# EAGLE board BMP384 Breakout-Panel (EAGLE 9.6.2), part 1 of 7
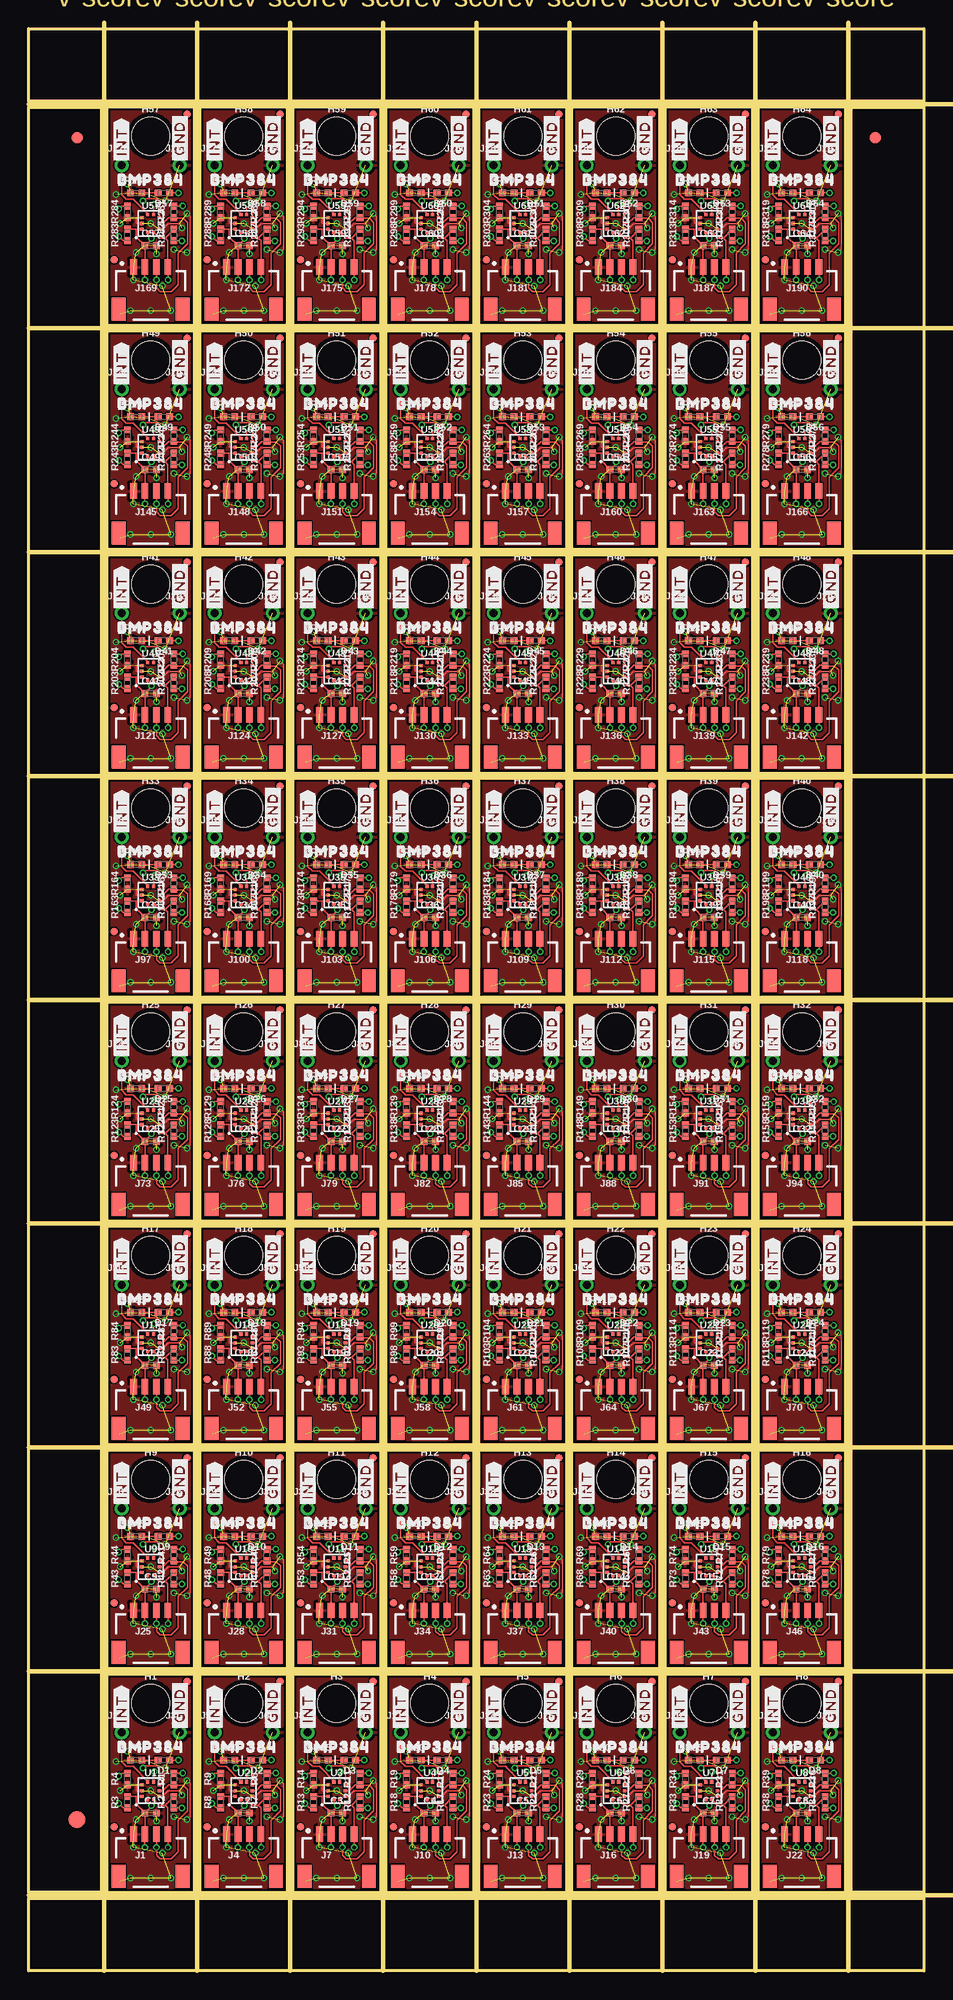
[diagram p0: board, top side]
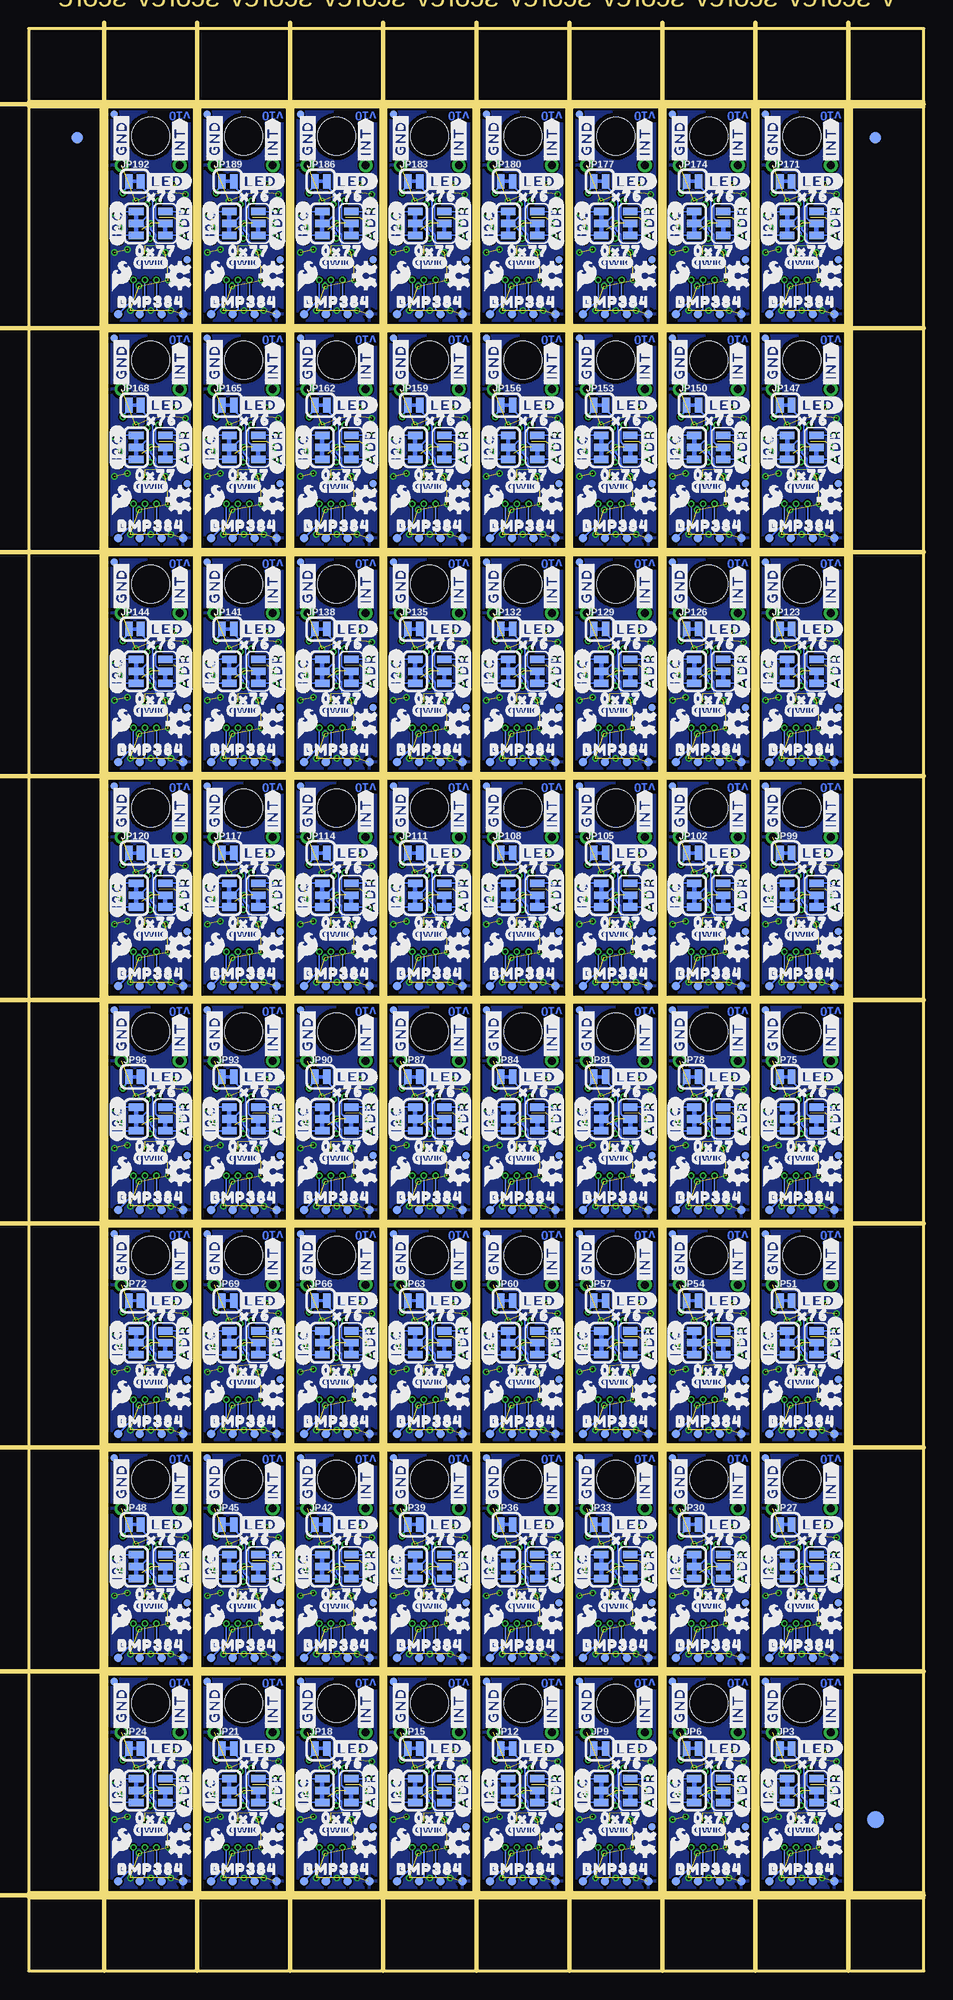
[diagram p1: board, bottom side, seen from below]

Size 78.23 x 169.67 mm. Coordinates in mm from the lower left corner, seen from the top.
Outline: 272 segments
Copper layers (1*2*15*16): Top 0.035559375mm / dielectric 0.47751875mm / Route2 0.035559375mm / dielectric 0.47751875mm / Route15 0.035559375mm / dielectric 0.47751875mm / Bottom 0.035559375mm
Design rules "BMP384 Breakout": minimum track width 5mil, minimum drill 0.2mm, track to track 5mil, track to pad 5mil, pad to pad 5mil, via to via 5mil, smd to smd 5mil, copper to edge 7mil, drill to drill 7mil, minimum pad ring 5mil, minimum via ring 5mil, stop-mask expansion 2.5mil, vias tented up to drill 25mil, thermal gap 10mil
tRestrict: area 9.8,15.9 to 10,16.1; area 9.8,16.4 to 10,16.6; area 11.3,14.9 to 11.6,15.1; area 10.1,15.6 to 10.2,15.9; area 17.9,15.9 to 18.2,16.1; area 17.9,16.4 to 18.2,16.6; area 19.4,14.9 to 19.7,15.1; area 18.2,15.6 to 18.4,15.9; area 26,15.9 to 26.3,16.1; area 26,16.4 to 26.3,16.6; area 27.6,14.9 to 27.8,15.1; area 26.3,15.6 to 26.5,15.9; 244 more areas
Milling: 18 lines

## Footprints (pad centres in the part's own frame; a part is rotated, then mirrored left to right if it is on the bottom)
0402-TIGHT = smd 0.6 x 0.6: 1 -0.5,0; 2 0.5,0
LED-0402 = smd 0.6 x 0.6: A -0.5,0; C 0.5,0
FIDUCIAL-1X2 = smd 1 x 1: 1 0,0
FIDUCIAL-1.5X3 = smd 1.5 x 1.5: 1 0,0
FIDUCIAL-MICRO = smd 0.635 x 0.635: 1 0,0
STAND-OFF = hole 3.302: 0,0
JST04_1MM_RA = smd 0.6 x 1.35: 1 -1.5,0; 2 -0.5,0; 3 0.5,0; 4 1.5,0 | smd 1.2 x 2: NC1 2.8,-3.675; NC2 -2.8,-3.675
1X01_1MM_NO_SILK = drill 0.7 pad 1.2: 1 0,0
SMT-JUMPER_3_1-NC_TRACE_SILK = smd 0.66 x 1.27: 1 -1.041,0; 2 0,0; 3 1.041,0
SMT-JUMPER_3_2-NC_TRACE_SILK = smd 0.66 x 1.27: 1 -1.041,0; 2 0,0; 3 1.041,0
SMT-JUMPER_2_NC_TRACE_SILK = smd 0.66 x 1.27: 1 -0.521,0; 2 0.521,0
PAD.03X.03 = smd 0.762 x 0.762: 1 0,0
LGA-10 = smd 0.27 x 0.285: 1 0.25,0.757; 2 -0.25,0.757; 6 -0.25,-0.757; 7 0.25,-0.757 | smd 0.285 x 0.27: 3 -0.757,0.5; 4 -0.757,0; 5 -0.757,-0.5; 8 0.757,-0.5; 9 0.757,0; 10 0.757,0.5

## Placement (x,y rotation side)
C1  0.1uF  [0402-TIGHT]  10.67,13.79 0 top
C2  0.1uF  [0402-TIGHT]  18.8,13.79 0 top
C3  0.1uF  [0402-TIGHT]  26.92,13.79 0 top
C4  0.1uF  [0402-TIGHT]  35.05,13.79 0 top
C5  0.1uF  [0402-TIGHT]  43.18,13.79 0 top
C6  0.1uF  [0402-TIGHT]  51.31,13.79 0 top
C7  0.1uF  [0402-TIGHT]  59.44,13.79 0 top
C8  0.1uF  [0402-TIGHT]  67.56,13.79 0 top
C9  0.1uF  [0402-TIGHT]  10.67,33.35 0 top
C10  0.1uF  [0402-TIGHT]  18.8,33.35 0 top
C11  0.1uF  [0402-TIGHT]  26.92,33.35 0 top
C12  0.1uF  [0402-TIGHT]  35.05,33.35 0 top
C13  0.1uF  [0402-TIGHT]  43.18,33.35 0 top
C14  0.1uF  [0402-TIGHT]  51.31,33.35 0 top
C15  0.1uF  [0402-TIGHT]  59.44,33.35 0 top
C16  0.1uF  [0402-TIGHT]  67.56,33.35 0 top
C17  0.1uF  [0402-TIGHT]  10.67,52.91 0 top
C18  0.1uF  [0402-TIGHT]  18.8,52.91 0 top
C19  0.1uF  [0402-TIGHT]  26.92,52.91 0 top
C20  0.1uF  [0402-TIGHT]  35.05,52.91 0 top
C21  0.1uF  [0402-TIGHT]  43.18,52.91 0 top
C22  0.1uF  [0402-TIGHT]  51.31,52.91 0 top
C23  0.1uF  [0402-TIGHT]  59.44,52.91 0 top
C24  0.1uF  [0402-TIGHT]  67.56,52.91 0 top
C25  0.1uF  [0402-TIGHT]  10.67,72.47 0 top
C26  0.1uF  [0402-TIGHT]  18.8,72.47 0 top
C27  0.1uF  [0402-TIGHT]  26.92,72.47 0 top
C28  0.1uF  [0402-TIGHT]  35.05,72.47 0 top
C29  0.1uF  [0402-TIGHT]  43.18,72.47 0 top
C30  0.1uF  [0402-TIGHT]  51.31,72.47 0 top
C31  0.1uF  [0402-TIGHT]  59.44,72.47 0 top
C32  0.1uF  [0402-TIGHT]  67.56,72.47 0 top
C33  0.1uF  [0402-TIGHT]  10.67,92.02 0 top
C34  0.1uF  [0402-TIGHT]  18.8,92.02 0 top
C35  0.1uF  [0402-TIGHT]  26.92,92.02 0 top
C36  0.1uF  [0402-TIGHT]  35.05,92.02 0 top
C37  0.1uF  [0402-TIGHT]  43.18,92.02 0 top
C38  0.1uF  [0402-TIGHT]  51.31,92.02 0 top
C39  0.1uF  [0402-TIGHT]  59.44,92.02 0 top
C40  0.1uF  [0402-TIGHT]  67.56,92.02 0 top
C41  0.1uF  [0402-TIGHT]  10.67,111.58 0 top
C42  0.1uF  [0402-TIGHT]  18.8,111.58 0 top
C43  0.1uF  [0402-TIGHT]  26.92,111.58 0 top
C44  0.1uF  [0402-TIGHT]  35.05,111.58 0 top
C45  0.1uF  [0402-TIGHT]  43.18,111.58 0 top
C46  0.1uF  [0402-TIGHT]  51.31,111.58 0 top
C47  0.1uF  [0402-TIGHT]  59.44,111.58 0 top
C48  0.1uF  [0402-TIGHT]  67.56,111.58 0 top
C49  0.1uF  [0402-TIGHT]  10.67,131.14 0 top
C50  0.1uF  [0402-TIGHT]  18.8,131.14 0 top
C51  0.1uF  [0402-TIGHT]  26.92,131.14 0 top
C52  0.1uF  [0402-TIGHT]  35.05,131.14 0 top
C53  0.1uF  [0402-TIGHT]  43.18,131.14 0 top
C54  0.1uF  [0402-TIGHT]  51.31,131.14 0 top
C55  0.1uF  [0402-TIGHT]  59.44,131.14 0 top
C56  0.1uF  [0402-TIGHT]  67.56,131.14 0 top
C57  0.1uF  [0402-TIGHT]  10.67,150.7 0 top
C58  0.1uF  [0402-TIGHT]  18.8,150.7 0 top
C59  0.1uF  [0402-TIGHT]  26.92,150.7 0 top
C60  0.1uF  [0402-TIGHT]  35.05,150.7 0 top
C61  0.1uF  [0402-TIGHT]  43.18,150.7 0 top
C62  0.1uF  [0402-TIGHT]  51.31,150.7 0 top
C63  0.1uF  [0402-TIGHT]  59.44,150.7 0 top
C64  0.1uF  [0402-TIGHT]  67.56,150.7 0 top
D1  RED  [LED-0402]  11.81,18.41 180 top
D2  RED  [LED-0402]  19.94,18.41 180 top
D3  RED  [LED-0402]  28.07,18.41 180 top
D4  RED  [LED-0402]  36.2,18.41 180 top
D5  RED  [LED-0402]  44.32,18.41 180 top
D6  RED  [LED-0402]  52.45,18.41 180 top
D7  RED  [LED-0402]  60.58,18.41 180 top
D8  RED  [LED-0402]  68.71,18.41 180 top
D9  RED  [LED-0402]  11.81,37.97 180 top
D10  RED  [LED-0402]  19.94,37.97 180 top
D11  RED  [LED-0402]  28.07,37.97 180 top
D12  RED  [LED-0402]  36.2,37.97 180 top
D13  RED  [LED-0402]  44.32,37.97 180 top
D14  RED  [LED-0402]  52.45,37.97 180 top
D15  RED  [LED-0402]  60.58,37.97 180 top
D16  RED  [LED-0402]  68.71,37.97 180 top
D17  RED  [LED-0402]  11.81,57.53 180 top
D18  RED  [LED-0402]  19.94,57.53 180 top
D19  RED  [LED-0402]  28.07,57.53 180 top
D20  RED  [LED-0402]  36.2,57.53 180 top
D21  RED  [LED-0402]  44.32,57.53 180 top
D22  RED  [LED-0402]  52.45,57.53 180 top
D23  RED  [LED-0402]  60.58,57.53 180 top
D24  RED  [LED-0402]  68.71,57.53 180 top
D25  RED  [LED-0402]  11.81,77.09 180 top
D26  RED  [LED-0402]  19.94,77.09 180 top
D27  RED  [LED-0402]  28.07,77.09 180 top
D28  RED  [LED-0402]  36.2,77.09 180 top
D29  RED  [LED-0402]  44.32,77.09 180 top
D30  RED  [LED-0402]  52.45,77.09 180 top
D31  RED  [LED-0402]  60.58,77.09 180 top
D32  RED  [LED-0402]  68.71,77.09 180 top
D33  RED  [LED-0402]  11.81,96.65 180 top
D34  RED  [LED-0402]  19.94,96.65 180 top
D35  RED  [LED-0402]  28.07,96.65 180 top
D36  RED  [LED-0402]  36.2,96.65 180 top
D37  RED  [LED-0402]  44.32,96.65 180 top
D38  RED  [LED-0402]  52.45,96.65 180 top
D39  RED  [LED-0402]  60.58,96.65 180 top
D40  RED  [LED-0402]  68.71,96.65 180 top
D41  RED  [LED-0402]  11.81,116.2 180 top
D42  RED  [LED-0402]  19.94,116.2 180 top
D43  RED  [LED-0402]  28.07,116.2 180 top
D44  RED  [LED-0402]  36.2,116.2 180 top
D45  RED  [LED-0402]  44.32,116.2 180 top
D46  RED  [LED-0402]  52.45,116.2 180 top
D47  RED  [LED-0402]  60.58,116.2 180 top
D48  RED  [LED-0402]  68.71,116.2 180 top
D49  RED  [LED-0402]  11.81,135.76 180 top
D50  RED  [LED-0402]  19.94,135.76 180 top
D51  RED  [LED-0402]  28.07,135.76 180 top
D52  RED  [LED-0402]  36.2,135.76 180 top
D53  RED  [LED-0402]  44.32,135.76 180 top
D54  RED  [LED-0402]  52.45,135.76 180 top
D55  RED  [LED-0402]  60.58,135.76 180 top
D56  RED  [LED-0402]  68.71,135.76 180 top
D57  RED  [LED-0402]  11.81,155.32 180 top
D58  RED  [LED-0402]  19.94,155.32 180 top
D59  RED  [LED-0402]  28.07,155.32 180 top
D60  RED  [LED-0402]  36.2,155.32 180 top
D61  RED  [LED-0402]  44.32,155.32 180 top
D62  RED  [LED-0402]  52.45,155.32 180 top
D63  RED  [LED-0402]  60.58,155.32 180 top
D64  RED  [LED-0402]  68.71,155.32 180 top
E$1  [FIDUCIAL-1X2]  4.23,160.15 0 top
E$2  [FIDUCIAL-1X2]  4.23,160.15 0 bottom
E$3  [FIDUCIAL-1X2]  74,160.15 0 top
E$4  [FIDUCIAL-1X2]  74,160.15 0 bottom
E$5  [FIDUCIAL-1.5X3]  4.23,13.21 0 top
E$6  [FIDUCIAL-1.5X3]  4.23,13.21 0 bottom
FD1  FIDUCIALUFIDUCIAL  [FIDUCIAL-MICRO]  13.84,25.27 0 top
FD2  FIDUCIALUFIDUCIAL  [FIDUCIAL-MICRO]  13.84,25.27 0 bottom
FD3  FIDUCIALUFIDUCIAL  [FIDUCIAL-MICRO]  7.49,12.57 0 top
FD4  FIDUCIALUFIDUCIAL  [FIDUCIAL-MICRO]  7.49,12.57 0 bottom
FD5  FIDUCIALUFIDUCIAL  [FIDUCIAL-MICRO]  21.97,25.27 0 top
FD6  FIDUCIALUFIDUCIAL  [FIDUCIAL-MICRO]  21.97,25.27 0 bottom
FD7  FIDUCIALUFIDUCIAL  [FIDUCIAL-MICRO]  15.62,12.57 0 top
FD8  FIDUCIALUFIDUCIAL  [FIDUCIAL-MICRO]  15.62,12.57 0 bottom
FD9  FIDUCIALUFIDUCIAL  [FIDUCIAL-MICRO]  30.1,25.27 0 top
FD10  FIDUCIALUFIDUCIAL  [FIDUCIAL-MICRO]  30.1,25.27 0 bottom
FD11  FIDUCIALUFIDUCIAL  [FIDUCIAL-MICRO]  23.75,12.57 0 top
FD12  FIDUCIALUFIDUCIAL  [FIDUCIAL-MICRO]  23.75,12.57 0 bottom
FD13  FIDUCIALUFIDUCIAL  [FIDUCIAL-MICRO]  38.23,25.27 0 top
FD14  FIDUCIALUFIDUCIAL  [FIDUCIAL-MICRO]  38.23,25.27 0 bottom
FD15  FIDUCIALUFIDUCIAL  [FIDUCIAL-MICRO]  31.88,12.57 0 top
FD16  FIDUCIALUFIDUCIAL  [FIDUCIAL-MICRO]  31.88,12.57 0 bottom
FD17  FIDUCIALUFIDUCIAL  [FIDUCIAL-MICRO]  46.35,25.27 0 top
FD18  FIDUCIALUFIDUCIAL  [FIDUCIAL-MICRO]  46.35,25.27 0 bottom
FD19  FIDUCIALUFIDUCIAL  [FIDUCIAL-MICRO]  40,12.57 0 top
FD20  FIDUCIALUFIDUCIAL  [FIDUCIAL-MICRO]  40,12.57 0 bottom
FD21  FIDUCIALUFIDUCIAL  [FIDUCIAL-MICRO]  54.48,25.27 0 top
FD22  FIDUCIALUFIDUCIAL  [FIDUCIAL-MICRO]  54.48,25.27 0 bottom
FD23  FIDUCIALUFIDUCIAL  [FIDUCIAL-MICRO]  48.13,12.57 0 top
FD24  FIDUCIALUFIDUCIAL  [FIDUCIAL-MICRO]  48.13,12.57 0 bottom
FD25  FIDUCIALUFIDUCIAL  [FIDUCIAL-MICRO]  62.61,25.27 0 top
FD26  FIDUCIALUFIDUCIAL  [FIDUCIAL-MICRO]  62.61,25.27 0 bottom
FD27  FIDUCIALUFIDUCIAL  [FIDUCIAL-MICRO]  56.26,12.57 0 top
FD28  FIDUCIALUFIDUCIAL  [FIDUCIAL-MICRO]  56.26,12.57 0 bottom
FD29  FIDUCIALUFIDUCIAL  [FIDUCIAL-MICRO]  70.74,25.27 0 top
FD30  FIDUCIALUFIDUCIAL  [FIDUCIAL-MICRO]  70.74,25.27 0 bottom
FD31  FIDUCIALUFIDUCIAL  [FIDUCIAL-MICRO]  64.39,12.57 0 top
FD32  FIDUCIALUFIDUCIAL  [FIDUCIAL-MICRO]  64.39,12.57 0 bottom
FD33  FIDUCIALUFIDUCIAL  [FIDUCIAL-MICRO]  13.84,44.83 0 top
FD34  FIDUCIALUFIDUCIAL  [FIDUCIAL-MICRO]  13.84,44.83 0 bottom
FD35  FIDUCIALUFIDUCIAL  [FIDUCIAL-MICRO]  7.49,32.13 0 top
FD36  FIDUCIALUFIDUCIAL  [FIDUCIAL-MICRO]  7.49,32.13 0 bottom
FD37  FIDUCIALUFIDUCIAL  [FIDUCIAL-MICRO]  21.97,44.83 0 top
FD38  FIDUCIALUFIDUCIAL  [FIDUCIAL-MICRO]  21.97,44.83 0 bottom
FD39  FIDUCIALUFIDUCIAL  [FIDUCIAL-MICRO]  15.62,32.13 0 top
FD40  FIDUCIALUFIDUCIAL  [FIDUCIAL-MICRO]  15.62,32.13 0 bottom
FD41  FIDUCIALUFIDUCIAL  [FIDUCIAL-MICRO]  30.1,44.83 0 top
FD42  FIDUCIALUFIDUCIAL  [FIDUCIAL-MICRO]  30.1,44.83 0 bottom
FD43  FIDUCIALUFIDUCIAL  [FIDUCIAL-MICRO]  23.75,32.13 0 top
FD44  FIDUCIALUFIDUCIAL  [FIDUCIAL-MICRO]  23.75,32.13 0 bottom
FD45  FIDUCIALUFIDUCIAL  [FIDUCIAL-MICRO]  38.23,44.83 0 top
FD46  FIDUCIALUFIDUCIAL  [FIDUCIAL-MICRO]  38.23,44.83 0 bottom
FD47  FIDUCIALUFIDUCIAL  [FIDUCIAL-MICRO]  31.88,32.13 0 top
FD48  FIDUCIALUFIDUCIAL  [FIDUCIAL-MICRO]  31.88,32.13 0 bottom
FD49  FIDUCIALUFIDUCIAL  [FIDUCIAL-MICRO]  46.35,44.83 0 top
FD50  FIDUCIALUFIDUCIAL  [FIDUCIAL-MICRO]  46.35,44.83 0 bottom
FD51  FIDUCIALUFIDUCIAL  [FIDUCIAL-MICRO]  40,32.13 0 top
FD52  FIDUCIALUFIDUCIAL  [FIDUCIAL-MICRO]  40,32.13 0 bottom
FD53  FIDUCIALUFIDUCIAL  [FIDUCIAL-MICRO]  54.48,44.83 0 top
FD54  FIDUCIALUFIDUCIAL  [FIDUCIAL-MICRO]  54.48,44.83 0 bottom
FD55  FIDUCIALUFIDUCIAL  [FIDUCIAL-MICRO]  48.13,32.13 0 top
FD56  FIDUCIALUFIDUCIAL  [FIDUCIAL-MICRO]  48.13,32.13 0 bottom
FD57  FIDUCIALUFIDUCIAL  [FIDUCIAL-MICRO]  62.61,44.83 0 top
FD58  FIDUCIALUFIDUCIAL  [FIDUCIAL-MICRO]  62.61,44.83 0 bottom
FD59  FIDUCIALUFIDUCIAL  [FIDUCIAL-MICRO]  56.26,32.13 0 top
FD60  FIDUCIALUFIDUCIAL  [FIDUCIAL-MICRO]  56.26,32.13 0 bottom
FD61  FIDUCIALUFIDUCIAL  [FIDUCIAL-MICRO]  70.74,44.83 0 top
FD62  FIDUCIALUFIDUCIAL  [FIDUCIAL-MICRO]  70.74,44.83 0 bottom
FD63  FIDUCIALUFIDUCIAL  [FIDUCIAL-MICRO]  64.39,32.13 0 top
FD64  FIDUCIALUFIDUCIAL  [FIDUCIAL-MICRO]  64.39,32.13 0 bottom
FD65  FIDUCIALUFIDUCIAL  [FIDUCIAL-MICRO]  13.84,64.39 0 top
FD66  FIDUCIALUFIDUCIAL  [FIDUCIAL-MICRO]  13.84,64.39 0 bottom
FD67  FIDUCIALUFIDUCIAL  [FIDUCIAL-MICRO]  7.49,51.69 0 top
FD68  FIDUCIALUFIDUCIAL  [FIDUCIAL-MICRO]  7.49,51.69 0 bottom
FD69  FIDUCIALUFIDUCIAL  [FIDUCIAL-MICRO]  21.97,64.39 0 top
FD70  FIDUCIALUFIDUCIAL  [FIDUCIAL-MICRO]  21.97,64.39 0 bottom
FD71  FIDUCIALUFIDUCIAL  [FIDUCIAL-MICRO]  15.62,51.69 0 top
FD72  FIDUCIALUFIDUCIAL  [FIDUCIAL-MICRO]  15.62,51.69 0 bottom
FD73  FIDUCIALUFIDUCIAL  [FIDUCIAL-MICRO]  30.1,64.39 0 top
FD74  FIDUCIALUFIDUCIAL  [FIDUCIAL-MICRO]  30.1,64.39 0 bottom
FD75  FIDUCIALUFIDUCIAL  [FIDUCIAL-MICRO]  23.75,51.69 0 top
FD76  FIDUCIALUFIDUCIAL  [FIDUCIAL-MICRO]  23.75,51.69 0 bottom
FD77  FIDUCIALUFIDUCIAL  [FIDUCIAL-MICRO]  38.23,64.39 0 top
FD78  FIDUCIALUFIDUCIAL  [FIDUCIAL-MICRO]  38.23,64.39 0 bottom
FD79  FIDUCIALUFIDUCIAL  [FIDUCIAL-MICRO]  31.88,51.69 0 top
FD80  FIDUCIALUFIDUCIAL  [FIDUCIAL-MICRO]  31.88,51.69 0 bottom
FD81  FIDUCIALUFIDUCIAL  [FIDUCIAL-MICRO]  46.35,64.39 0 top
FD82  FIDUCIALUFIDUCIAL  [FIDUCIAL-MICRO]  46.35,64.39 0 bottom
FD83  FIDUCIALUFIDUCIAL  [FIDUCIAL-MICRO]  40,51.69 0 top
FD84  FIDUCIALUFIDUCIAL  [FIDUCIAL-MICRO]  40,51.69 0 bottom
FD85  FIDUCIALUFIDUCIAL  [FIDUCIAL-MICRO]  54.48,64.39 0 top
FD86  FIDUCIALUFIDUCIAL  [FIDUCIAL-MICRO]  54.48,64.39 0 bottom
FD87  FIDUCIALUFIDUCIAL  [FIDUCIAL-MICRO]  48.13,51.69 0 top
FD88  FIDUCIALUFIDUCIAL  [FIDUCIAL-MICRO]  48.13,51.69 0 bottom
FD89  FIDUCIALUFIDUCIAL  [FIDUCIAL-MICRO]  62.61,64.39 0 top
FD90  FIDUCIALUFIDUCIAL  [FIDUCIAL-MICRO]  62.61,64.39 0 bottom
FD91  FIDUCIALUFIDUCIAL  [FIDUCIAL-MICRO]  56.26,51.69 0 top
FD92  FIDUCIALUFIDUCIAL  [FIDUCIAL-MICRO]  56.26,51.69 0 bottom
FD93  FIDUCIALUFIDUCIAL  [FIDUCIAL-MICRO]  70.74,64.39 0 top
FD94  FIDUCIALUFIDUCIAL  [FIDUCIAL-MICRO]  70.74,64.39 0 bottom
FD95  FIDUCIALUFIDUCIAL  [FIDUCIAL-MICRO]  64.39,51.69 0 top
FD96  FIDUCIALUFIDUCIAL  [FIDUCIAL-MICRO]  64.39,51.69 0 bottom
FD97  FIDUCIALUFIDUCIAL  [FIDUCIAL-MICRO]  13.84,83.95 0 top
FD98  FIDUCIALUFIDUCIAL  [FIDUCIAL-MICRO]  13.84,83.95 0 bottom
FD99  FIDUCIALUFIDUCIAL  [FIDUCIAL-MICRO]  7.49,71.25 0 top
FD100  FIDUCIALUFIDUCIAL  [FIDUCIAL-MICRO]  7.49,71.25 0 bottom
FD101  FIDUCIALUFIDUCIAL  [FIDUCIAL-MICRO]  21.97,83.95 0 top
FD102  FIDUCIALUFIDUCIAL  [FIDUCIAL-MICRO]  21.97,83.95 0 bottom
FD103  FIDUCIALUFIDUCIAL  [FIDUCIAL-MICRO]  15.62,71.25 0 top
FD104  FIDUCIALUFIDUCIAL  [FIDUCIAL-MICRO]  15.62,71.25 0 bottom
FD105  FIDUCIALUFIDUCIAL  [FIDUCIAL-MICRO]  30.1,83.95 0 top
FD106  FIDUCIALUFIDUCIAL  [FIDUCIAL-MICRO]  30.1,83.95 0 bottom
FD107  FIDUCIALUFIDUCIAL  [FIDUCIAL-MICRO]  23.75,71.25 0 top
FD108  FIDUCIALUFIDUCIAL  [FIDUCIAL-MICRO]  23.75,71.25 0 bottom
FD109  FIDUCIALUFIDUCIAL  [FIDUCIAL-MICRO]  38.23,83.95 0 top
FD110  FIDUCIALUFIDUCIAL  [FIDUCIAL-MICRO]  38.23,83.95 0 bottom
FD111  FIDUCIALUFIDUCIAL  [FIDUCIAL-MICRO]  31.88,71.25 0 top
FD112  FIDUCIALUFIDUCIAL  [FIDUCIAL-MICRO]  31.88,71.25 0 bottom
FD113  FIDUCIALUFIDUCIAL  [FIDUCIAL-MICRO]  46.35,83.95 0 top
FD114  FIDUCIALUFIDUCIAL  [FIDUCIAL-MICRO]  46.35,83.95 0 bottom
FD115  FIDUCIALUFIDUCIAL  [FIDUCIAL-MICRO]  40,71.25 0 top
FD116  FIDUCIALUFIDUCIAL  [FIDUCIAL-MICRO]  40,71.25 0 bottom
FD117  FIDUCIALUFIDUCIAL  [FIDUCIAL-MICRO]  54.48,83.95 0 top
FD118  FIDUCIALUFIDUCIAL  [FIDUCIAL-MICRO]  54.48,83.95 0 bottom
FD119  FIDUCIALUFIDUCIAL  [FIDUCIAL-MICRO]  48.13,71.25 0 top
FD120  FIDUCIALUFIDUCIAL  [FIDUCIAL-MICRO]  48.13,71.25 0 bottom
FD121  FIDUCIALUFIDUCIAL  [FIDUCIAL-MICRO]  62.61,83.95 0 top
FD122  FIDUCIALUFIDUCIAL  [FIDUCIAL-MICRO]  62.61,83.95 0 bottom
FD123  FIDUCIALUFIDUCIAL  [FIDUCIAL-MICRO]  56.26,71.25 0 top
FD124  FIDUCIALUFIDUCIAL  [FIDUCIAL-MICRO]  56.26,71.25 0 bottom
FD125  FIDUCIALUFIDUCIAL  [FIDUCIAL-MICRO]  70.74,83.95 0 top
FD126  FIDUCIALUFIDUCIAL  [FIDUCIAL-MICRO]  70.74,83.95 0 bottom
FD127  FIDUCIALUFIDUCIAL  [FIDUCIAL-MICRO]  64.39,71.25 0 top
FD128  FIDUCIALUFIDUCIAL  [FIDUCIAL-MICRO]  64.39,71.25 0 bottom
FD129  FIDUCIALUFIDUCIAL  [FIDUCIAL-MICRO]  13.84,103.51 0 top
FD130  FIDUCIALUFIDUCIAL  [FIDUCIAL-MICRO]  13.84,103.51 0 bottom
FD131  FIDUCIALUFIDUCIAL  [FIDUCIAL-MICRO]  7.49,90.81 0 top
FD132  FIDUCIALUFIDUCIAL  [FIDUCIAL-MICRO]  7.49,90.81 0 bottom
FD133  FIDUCIALUFIDUCIAL  [FIDUCIAL-MICRO]  21.97,103.51 0 top
FD134  FIDUCIALUFIDUCIAL  [FIDUCIAL-MICRO]  21.97,103.51 0 bottom
FD135  FIDUCIALUFIDUCIAL  [FIDUCIAL-MICRO]  15.62,90.81 0 top
FD136  FIDUCIALUFIDUCIAL  [FIDUCIAL-MICRO]  15.62,90.81 0 bottom
FD137  FIDUCIALUFIDUCIAL  [FIDUCIAL-MICRO]  30.1,103.51 0 top
FD138  FIDUCIALUFIDUCIAL  [FIDUCIAL-MICRO]  30.1,103.51 0 bottom
FD139  FIDUCIALUFIDUCIAL  [FIDUCIAL-MICRO]  23.75,90.81 0 top
FD140  FIDUCIALUFIDUCIAL  [FIDUCIAL-MICRO]  23.75,90.81 0 bottom
FD141  FIDUCIALUFIDUCIAL  [FIDUCIAL-MICRO]  38.23,103.51 0 top
FD142  FIDUCIALUFIDUCIAL  [FIDUCIAL-MICRO]  38.23,103.51 0 bottom
FD143  FIDUCIALUFIDUCIAL  [FIDUCIAL-MICRO]  31.88,90.81 0 top
FD144  FIDUCIALUFIDUCIAL  [FIDUCIAL-MICRO]  31.88,90.81 0 bottom
FD145  FIDUCIALUFIDUCIAL  [FIDUCIAL-MICRO]  46.35,103.51 0 top
FD146  FIDUCIALUFIDUCIAL  [FIDUCIAL-MICRO]  46.35,103.51 0 bottom
FD147  FIDUCIALUFIDUCIAL  [FIDUCIAL-MICRO]  40,90.81 0 top
FD148  FIDUCIALUFIDUCIAL  [FIDUCIAL-MICRO]  40,90.81 0 bottom
FD149  FIDUCIALUFIDUCIAL  [FIDUCIAL-MICRO]  54.48,103.51 0 top
FD150  FIDUCIALUFIDUCIAL  [FIDUCIAL-MICRO]  54.48,103.51 0 bottom
FD151  FIDUCIALUFIDUCIAL  [FIDUCIAL-MICRO]  48.13,90.81 0 top
FD152  FIDUCIALUFIDUCIAL  [FIDUCIAL-MICRO]  48.13,90.81 0 bottom
FD153  FIDUCIALUFIDUCIAL  [FIDUCIAL-MICRO]  62.61,103.51 0 top
FD154  FIDUCIALUFIDUCIAL  [FIDUCIAL-MICRO]  62.61,103.51 0 bottom
FD155  FIDUCIALUFIDUCIAL  [FIDUCIAL-MICRO]  56.26,90.81 0 top
FD156  FIDUCIALUFIDUCIAL  [FIDUCIAL-MICRO]  56.26,90.81 0 bottom
FD157  FIDUCIALUFIDUCIAL  [FIDUCIAL-MICRO]  70.74,103.51 0 top
FD158  FIDUCIALUFIDUCIAL  [FIDUCIAL-MICRO]  70.74,103.51 0 bottom
FD159  FIDUCIALUFIDUCIAL  [FIDUCIAL-MICRO]  64.39,90.81 0 top
FD160  FIDUCIALUFIDUCIAL  [FIDUCIAL-MICRO]  64.39,90.81 0 bottom
FD161  FIDUCIALUFIDUCIAL  [FIDUCIAL-MICRO]  13.84,123.06 0 top
FD162  FIDUCIALUFIDUCIAL  [FIDUCIAL-MICRO]  13.84,123.06 0 bottom
FD163  FIDUCIALUFIDUCIAL  [FIDUCIAL-MICRO]  7.49,110.36 0 top
FD164  FIDUCIALUFIDUCIAL  [FIDUCIAL-MICRO]  7.49,110.36 0 bottom
FD165  FIDUCIALUFIDUCIAL  [FIDUCIAL-MICRO]  21.97,123.06 0 top
FD166  FIDUCIALUFIDUCIAL  [FIDUCIAL-MICRO]  21.97,123.06 0 bottom
FD167  FIDUCIALUFIDUCIAL  [FIDUCIAL-MICRO]  15.62,110.36 0 top
FD168  FIDUCIALUFIDUCIAL  [FIDUCIAL-MICRO]  15.62,110.36 0 bottom
FD169  FIDUCIALUFIDUCIAL  [FIDUCIAL-MICRO]  30.1,123.06 0 top
FD170  FIDUCIALUFIDUCIAL  [FIDUCIAL-MICRO]  30.1,123.06 0 bottom
FD171  FIDUCIALUFIDUCIAL  [FIDUCIAL-MICRO]  23.75,110.36 0 top
FD172  FIDUCIALUFIDUCIAL  [FIDUCIAL-MICRO]  23.75,110.36 0 bottom
FD173  FIDUCIALUFIDUCIAL  [FIDUCIAL-MICRO]  38.23,123.06 0 top
FD174  FIDUCIALUFIDUCIAL  [FIDUCIAL-MICRO]  38.23,123.06 0 bottom
FD175  FIDUCIALUFIDUCIAL  [FIDUCIAL-MICRO]  31.88,110.36 0 top
FD176  FIDUCIALUFIDUCIAL  [FIDUCIAL-MICRO]  31.88,110.36 0 bottom
FD177  FIDUCIALUFIDUCIAL  [FIDUCIAL-MICRO]  46.35,123.06 0 top
FD178  FIDUCIALUFIDUCIAL  [FIDUCIAL-MICRO]  46.35,123.06 0 bottom
FD179  FIDUCIALUFIDUCIAL  [FIDUCIAL-MICRO]  40,110.36 0 top
FD180  FIDUCIALUFIDUCIAL  [FIDUCIAL-MICRO]  40,110.36 0 bottom
FD181  FIDUCIALUFIDUCIAL  [FIDUCIAL-MICRO]  54.48,123.06 0 top
FD182  FIDUCIALUFIDUCIAL  [FIDUCIAL-MICRO]  54.48,123.06 0 bottom
FD183  FIDUCIALUFIDUCIAL  [FIDUCIAL-MICRO]  48.13,110.36 0 top
FD184  FIDUCIALUFIDUCIAL  [FIDUCIAL-MICRO]  48.13,110.36 0 bottom
FD185  FIDUCIALUFIDUCIAL  [FIDUCIAL-MICRO]  62.61,123.06 0 top
FD186  FIDUCIALUFIDUCIAL  [FIDUCIAL-MICRO]  62.61,123.06 0 bottom
FD187  FIDUCIALUFIDUCIAL  [FIDUCIAL-MICRO]  56.26,110.36 0 top
FD188  FIDUCIALUFIDUCIAL  [FIDUCIAL-MICRO]  56.26,110.36 0 bottom
FD189  FIDUCIALUFIDUCIAL  [FIDUCIAL-MICRO]  70.74,123.06 0 top
FD190  FIDUCIALUFIDUCIAL  [FIDUCIAL-MICRO]  70.74,123.06 0 bottom
FD191  FIDUCIALUFIDUCIAL  [FIDUCIAL-MICRO]  64.39,110.36 0 top
FD192  FIDUCIALUFIDUCIAL  [FIDUCIAL-MICRO]  64.39,110.36 0 bottom
FD193  FIDUCIALUFIDUCIAL  [FIDUCIAL-MICRO]  13.84,142.62 0 top
FD194  FIDUCIALUFIDUCIAL  [FIDUCIAL-MICRO]  13.84,142.62 0 bottom
FD195  FIDUCIALUFIDUCIAL  [FIDUCIAL-MICRO]  7.49,129.92 0 top
FD196  FIDUCIALUFIDUCIAL  [FIDUCIAL-MICRO]  7.49,129.92 0 bottom
FD197  FIDUCIALUFIDUCIAL  [FIDUCIAL-MICRO]  21.97,142.62 0 top
FD198  FIDUCIALUFIDUCIAL  [FIDUCIAL-MICRO]  21.97,142.62 0 bottom
FD199  FIDUCIALUFIDUCIAL  [FIDUCIAL-MICRO]  15.62,129.92 0 top
FD200  FIDUCIALUFIDUCIAL  [FIDUCIAL-MICRO]  15.62,129.92 0 bottom
FD201  FIDUCIALUFIDUCIAL  [FIDUCIAL-MICRO]  30.1,142.62 0 top
FD202  FIDUCIALUFIDUCIAL  [FIDUCIAL-MICRO]  30.1,142.62 0 bottom
FD203  FIDUCIALUFIDUCIAL  [FIDUCIAL-MICRO]  23.75,129.92 0 top
FD204  FIDUCIALUFIDUCIAL  [FIDUCIAL-MICRO]  23.75,129.92 0 bottom
FD205  FIDUCIALUFIDUCIAL  [FIDUCIAL-MICRO]  38.23,142.62 0 top
FD206  FIDUCIALUFIDUCIAL  [FIDUCIAL-MICRO]  38.23,142.62 0 bottom
FD207  FIDUCIALUFIDUCIAL  [FIDUCIAL-MICRO]  31.88,129.92 0 top
FD208  FIDUCIALUFIDUCIAL  [FIDUCIAL-MICRO]  31.88,129.92 0 bottom
FD209  FIDUCIALUFIDUCIAL  [FIDUCIAL-MICRO]  46.35,142.62 0 top
FD210  FIDUCIALUFIDUCIAL  [FIDUCIAL-MICRO]  46.35,142.62 0 bottom
FD211  FIDUCIALUFIDUCIAL  [FIDUCIAL-MICRO]  40,129.92 0 top
FD212  FIDUCIALUFIDUCIAL  [FIDUCIAL-MICRO]  40,129.92 0 bottom
FD213  FIDUCIALUFIDUCIAL  [FIDUCIAL-MICRO]  54.48,142.62 0 top
FD214  FIDUCIALUFIDUCIAL  [FIDUCIAL-MICRO]  54.48,142.62 0 bottom
FD215  FIDUCIALUFIDUCIAL  [FIDUCIAL-MICRO]  48.13,129.92 0 top
FD216  FIDUCIALUFIDUCIAL  [FIDUCIAL-MICRO]  48.13,129.92 0 bottom
FD217  FIDUCIALUFIDUCIAL  [FIDUCIAL-MICRO]  62.61,142.62 0 top
FD218  FIDUCIALUFIDUCIAL  [FIDUCIAL-MICRO]  62.61,142.62 0 bottom
FD219  FIDUCIALUFIDUCIAL  [FIDUCIAL-MICRO]  56.26,129.92 0 top
FD220  FIDUCIALUFIDUCIAL  [FIDUCIAL-MICRO]  56.26,129.92 0 bottom
FD221  FIDUCIALUFIDUCIAL  [FIDUCIAL-MICRO]  70.74,142.62 0 top
FD222  FIDUCIALUFIDUCIAL  [FIDUCIAL-MICRO]  70.74,142.62 0 bottom
FD223  FIDUCIALUFIDUCIAL  [FIDUCIAL-MICRO]  64.39,129.92 0 top
FD224  FIDUCIALUFIDUCIAL  [FIDUCIAL-MICRO]  64.39,129.92 0 bottom
FD225  FIDUCIALUFIDUCIAL  [FIDUCIAL-MICRO]  13.84,162.18 0 top
FD226  FIDUCIALUFIDUCIAL  [FIDUCIAL-MICRO]  13.84,162.18 0 bottom
FD227  FIDUCIALUFIDUCIAL  [FIDUCIAL-MICRO]  7.49,149.48 0 top
FD228  FIDUCIALUFIDUCIAL  [FIDUCIAL-MICRO]  7.49,149.48 0 bottom
FD229  FIDUCIALUFIDUCIAL  [FIDUCIAL-MICRO]  21.97,162.18 0 top
FD230  FIDUCIALUFIDUCIAL  [FIDUCIAL-MICRO]  21.97,162.18 0 bottom
FD231  FIDUCIALUFIDUCIAL  [FIDUCIAL-MICRO]  15.62,149.48 0 top
FD232  FIDUCIALUFIDUCIAL  [FIDUCIAL-MICRO]  15.62,149.48 0 bottom
FD233  FIDUCIALUFIDUCIAL  [FIDUCIAL-MICRO]  30.1,162.18 0 top
FD234  FIDUCIALUFIDUCIAL  [FIDUCIAL-MICRO]  30.1,162.18 0 bottom
FD235  FIDUCIALUFIDUCIAL  [FIDUCIAL-MICRO]  23.75,149.48 0 top
FD236  FIDUCIALUFIDUCIAL  [FIDUCIAL-MICRO]  23.75,149.48 0 bottom
FD237  FIDUCIALUFIDUCIAL  [FIDUCIAL-MICRO]  38.23,162.18 0 top
FD238  FIDUCIALUFIDUCIAL  [FIDUCIAL-MICRO]  38.23,162.18 0 bottom
FD239  FIDUCIALUFIDUCIAL  [FIDUCIAL-MICRO]  31.88,149.48 0 top
FD240  FIDUCIALUFIDUCIAL  [FIDUCIAL-MICRO]  31.88,149.48 0 bottom
FD241  FIDUCIALUFIDUCIAL  [FIDUCIAL-MICRO]  46.35,162.18 0 top
FD242  FIDUCIALUFIDUCIAL  [FIDUCIAL-MICRO]  46.35,162.18 0 bottom
FD243  FIDUCIALUFIDUCIAL  [FIDUCIAL-MICRO]  40,149.48 0 top
FD244  FIDUCIALUFIDUCIAL  [FIDUCIAL-MICRO]  40,149.48 0 bottom
FD245  FIDUCIALUFIDUCIAL  [FIDUCIAL-MICRO]  54.48,162.18 0 top
FD246  FIDUCIALUFIDUCIAL  [FIDUCIAL-MICRO]  54.48,162.18 0 bottom
FD247  FIDUCIALUFIDUCIAL  [FIDUCIAL-MICRO]  48.13,149.48 0 top
FD248  FIDUCIALUFIDUCIAL  [FIDUCIAL-MICRO]  48.13,149.48 0 bottom
FD249  FIDUCIALUFIDUCIAL  [FIDUCIAL-MICRO]  62.61,162.18 0 top
FD250  FIDUCIALUFIDUCIAL  [FIDUCIAL-MICRO]  62.61,162.18 0 bottom
FD251  FIDUCIALUFIDUCIAL  [FIDUCIAL-MICRO]  56.26,149.48 0 top
FD252  FIDUCIALUFIDUCIAL  [FIDUCIAL-MICRO]  56.26,149.48 0 bottom
FD253  FIDUCIALUFIDUCIAL  [FIDUCIAL-MICRO]  70.74,162.18 0 top
FD254  FIDUCIALUFIDUCIAL  [FIDUCIAL-MICRO]  70.74,162.18 0 bottom
FD255  FIDUCIALUFIDUCIAL  [FIDUCIAL-MICRO]  64.39,149.48 0 top
FD256  FIDUCIALUFIDUCIAL  [FIDUCIAL-MICRO]  64.39,149.48 0 bottom
FRAME1  FRAME-LETTER  [CREATIVE_COMMONS]  -10.92,-7.11 0 top  (outside the outline)
FRAME2  FRAME-LETTER  [CREATIVE_COMMONS]  -2.79,-7.11 0 top  (outside the outline)
FRAME3  FRAME-LETTER  [CREATIVE_COMMONS]  5.33,-7.11 0 top  (outside the outline)
FRAME4  FRAME-LETTER  [CREATIVE_COMMONS]  13.46,-7.11 0 top  (outside the outline)
FRAME5  FRAME-LETTER  [CREATIVE_COMMONS]  21.59,-7.11 0 top  (outside the outline)
FRAME6  FRAME-LETTER  [CREATIVE_COMMONS]  29.72,-7.11 0 top  (outside the outline)
FRAME7  FRAME-LETTER  [CREATIVE_COMMONS]  37.85,-7.11 0 top  (outside the outline)
FRAME8  FRAME-LETTER  [CREATIVE_COMMONS]  45.97,-7.11 0 top  (outside the outline)
FRAME9  FRAME-LETTER  [CREATIVE_COMMONS]  -10.92,12.45 0 top  (outside the outline)
FRAME10  FRAME-LETTER  [CREATIVE_COMMONS]  -2.79,12.45 0 top
FRAME11  FRAME-LETTER  [CREATIVE_COMMONS]  5.33,12.45 0 top
FRAME12  FRAME-LETTER  [CREATIVE_COMMONS]  13.46,12.45 0 top
FRAME13  FRAME-LETTER  [CREATIVE_COMMONS]  21.59,12.45 0 top
FRAME14  FRAME-LETTER  [CREATIVE_COMMONS]  29.72,12.45 0 top
FRAME15  FRAME-LETTER  [CREATIVE_COMMONS]  37.85,12.45 0 top
FRAME16  FRAME-LETTER  [CREATIVE_COMMONS]  45.97,12.45 0 top
FRAME17  FRAME-LETTER  [CREATIVE_COMMONS]  -10.92,32 0 top  (outside the outline)
FRAME18  FRAME-LETTER  [CREATIVE_COMMONS]  -2.79,32 0 top
FRAME19  FRAME-LETTER  [CREATIVE_COMMONS]  5.33,32 0 top
FRAME20  FRAME-LETTER  [CREATIVE_COMMONS]  13.46,32 0 top
FRAME21  FRAME-LETTER  [CREATIVE_COMMONS]  21.59,32 0 top
FRAME22  FRAME-LETTER  [CREATIVE_COMMONS]  29.72,32 0 top
FRAME23  FRAME-LETTER  [CREATIVE_COMMONS]  37.85,32 0 top
FRAME24  FRAME-LETTER  [CREATIVE_COMMONS]  45.97,32 0 top
FRAME25  FRAME-LETTER  [CREATIVE_COMMONS]  -10.92,51.56 0 top  (outside the outline)
FRAME26  FRAME-LETTER  [CREATIVE_COMMONS]  -2.79,51.56 0 top
FRAME27  FRAME-LETTER  [CREATIVE_COMMONS]  5.33,51.56 0 top
FRAME28  FRAME-LETTER  [CREATIVE_COMMONS]  13.46,51.56 0 top
FRAME29  FRAME-LETTER  [CREATIVE_COMMONS]  21.59,51.56 0 top
FRAME30  FRAME-LETTER  [CREATIVE_COMMONS]  29.72,51.56 0 top
FRAME31  FRAME-LETTER  [CREATIVE_COMMONS]  37.85,51.56 0 top
FRAME32  FRAME-LETTER  [CREATIVE_COMMONS]  45.97,51.56 0 top
FRAME33  FRAME-LETTER  [CREATIVE_COMMONS]  -10.92,71.12 0 top  (outside the outline)
FRAME34  FRAME-LETTER  [CREATIVE_COMMONS]  -2.79,71.12 0 top
FRAME35  FRAME-LETTER  [CREATIVE_COMMONS]  5.33,71.12 0 top
FRAME36  FRAME-LETTER  [CREATIVE_COMMONS]  13.46,71.12 0 top
FRAME37  FRAME-LETTER  [CREATIVE_COMMONS]  21.59,71.12 0 top
FRAME38  FRAME-LETTER  [CREATIVE_COMMONS]  29.72,71.12 0 top
FRAME39  FRAME-LETTER  [CREATIVE_COMMONS]  37.85,71.12 0 top
FRAME40  FRAME-LETTER  [CREATIVE_COMMONS]  45.97,71.12 0 top
FRAME41  FRAME-LETTER  [CREATIVE_COMMONS]  -10.92,90.68 0 top  (outside the outline)
FRAME42  FRAME-LETTER  [CREATIVE_COMMONS]  -2.79,90.68 0 top
FRAME43  FRAME-LETTER  [CREATIVE_COMMONS]  5.33,90.68 0 top
FRAME44  FRAME-LETTER  [CREATIVE_COMMONS]  13.46,90.68 0 top
FRAME45  FRAME-LETTER  [CREATIVE_COMMONS]  21.59,90.68 0 top
FRAME46  FRAME-LETTER  [CREATIVE_COMMONS]  29.72,90.68 0 top
FRAME47  FRAME-LETTER  [CREATIVE_COMMONS]  37.85,90.68 0 top
FRAME48  FRAME-LETTER  [CREATIVE_COMMONS]  45.97,90.68 0 top
FRAME49  FRAME-LETTER  [CREATIVE_COMMONS]  -10.92,110.24 0 top  (outside the outline)
FRAME50  FRAME-LETTER  [CREATIVE_COMMONS]  -2.79,110.24 0 top
FRAME51  FRAME-LETTER  [CREATIVE_COMMONS]  5.33,110.24 0 top
FRAME52  FRAME-LETTER  [CREATIVE_COMMONS]  13.46,110.24 0 top
FRAME53  FRAME-LETTER  [CREATIVE_COMMONS]  21.59,110.24 0 top
FRAME54  FRAME-LETTER  [CREATIVE_COMMONS]  29.72,110.24 0 top
FRAME55  FRAME-LETTER  [CREATIVE_COMMONS]  37.85,110.24 0 top
FRAME56  FRAME-LETTER  [CREATIVE_COMMONS]  45.97,110.24 0 top
FRAME57  FRAME-LETTER  [CREATIVE_COMMONS]  -10.92,129.79 0 top  (outside the outline)
FRAME58  FRAME-LETTER  [CREATIVE_COMMONS]  -2.79,129.79 0 top
FRAME59  FRAME-LETTER  [CREATIVE_COMMONS]  5.33,129.79 0 top
FRAME60  FRAME-LETTER  [CREATIVE_COMMONS]  13.46,129.79 0 top
FRAME61  FRAME-LETTER  [CREATIVE_COMMONS]  21.59,129.79 0 top
FRAME62  FRAME-LETTER  [CREATIVE_COMMONS]  29.72,129.79 0 top
FRAME63  FRAME-LETTER  [CREATIVE_COMMONS]  37.85,129.79 0 top
FRAME64  FRAME-LETTER  [CREATIVE_COMMONS]  45.97,129.79 0 top
H1  STAND-OFF  [STAND-OFF]  10.67,23.37 0 top
H2  STAND-OFF  [STAND-OFF]  18.8,23.37 0 top
H3  STAND-OFF  [STAND-OFF]  26.92,23.37 0 top
H4  STAND-OFF  [STAND-OFF]  35.05,23.37 0 top
H5  STAND-OFF  [STAND-OFF]  43.18,23.37 0 top
H6  STAND-OFF  [STAND-OFF]  51.31,23.37 0 top
H7  STAND-OFF  [STAND-OFF]  59.44,23.37 0 top
H8  STAND-OFF  [STAND-OFF]  67.56,23.37 0 top
H9  STAND-OFF  [STAND-OFF]  10.67,42.93 0 top
H10  STAND-OFF  [STAND-OFF]  18.8,42.93 0 top
H11  STAND-OFF  [STAND-OFF]  26.92,42.93 0 top
H12  STAND-OFF  [STAND-OFF]  35.05,42.93 0 top
H13  STAND-OFF  [STAND-OFF]  43.18,42.93 0 top
H14  STAND-OFF  [STAND-OFF]  51.31,42.93 0 top
H15  STAND-OFF  [STAND-OFF]  59.44,42.93 0 top
H16  STAND-OFF  [STAND-OFF]  67.56,42.93 0 top
H17  STAND-OFF  [STAND-OFF]  10.67,62.48 0 top
H18  STAND-OFF  [STAND-OFF]  18.8,62.48 0 top
H19  STAND-OFF  [STAND-OFF]  26.92,62.48 0 top
H20  STAND-OFF  [STAND-OFF]  35.05,62.48 0 top
H21  STAND-OFF  [STAND-OFF]  43.18,62.48 0 top
H22  STAND-OFF  [STAND-OFF]  51.31,62.48 0 top
H23  STAND-OFF  [STAND-OFF]  59.44,62.48 0 top
H24  STAND-OFF  [STAND-OFF]  67.56,62.48 0 top
H25  STAND-OFF  [STAND-OFF]  10.67,82.04 0 top
H26  STAND-OFF  [STAND-OFF]  18.8,82.04 0 top
H27  STAND-OFF  [STAND-OFF]  26.92,82.04 0 top
H28  STAND-OFF  [STAND-OFF]  35.05,82.04 0 top
H29  STAND-OFF  [STAND-OFF]  43.18,82.04 0 top
H30  STAND-OFF  [STAND-OFF]  51.31,82.04 0 top
H31  STAND-OFF  [STAND-OFF]  59.44,82.04 0 top
H32  STAND-OFF  [STAND-OFF]  67.56,82.04 0 top
H33  STAND-OFF  [STAND-OFF]  10.67,101.6 0 top
H34  STAND-OFF  [STAND-OFF]  18.8,101.6 0 top
H35  STAND-OFF  [STAND-OFF]  26.92,101.6 0 top
H36  STAND-OFF  [STAND-OFF]  35.05,101.6 0 top
H37  STAND-OFF  [STAND-OFF]  43.18,101.6 0 top
H38  STAND-OFF  [STAND-OFF]  51.31,101.6 0 top
H39  STAND-OFF  [STAND-OFF]  59.44,101.6 0 top
H40  STAND-OFF  [STAND-OFF]  67.56,101.6 0 top
H41  STAND-OFF  [STAND-OFF]  10.67,121.16 0 top
H42  STAND-OFF  [STAND-OFF]  18.8,121.16 0 top
H43  STAND-OFF  [STAND-OFF]  26.92,121.16 0 top
H44  STAND-OFF  [STAND-OFF]  35.05,121.16 0 top
H45  STAND-OFF  [STAND-OFF]  43.18,121.16 0 top
H46  STAND-OFF  [STAND-OFF]  51.31,121.16 0 top
H47  STAND-OFF  [STAND-OFF]  59.44,121.16 0 top
H48  STAND-OFF  [STAND-OFF]  67.56,121.16 0 top
H49  STAND-OFF  [STAND-OFF]  10.67,140.72 0 top
H50  STAND-OFF  [STAND-OFF]  18.8,140.72 0 top
H51  STAND-OFF  [STAND-OFF]  26.92,140.72 0 top
H52  STAND-OFF  [STAND-OFF]  35.05,140.72 0 top
H53  STAND-OFF  [STAND-OFF]  43.18,140.72 0 top
H54  STAND-OFF  [STAND-OFF]  51.31,140.72 0 top
H55  STAND-OFF  [STAND-OFF]  59.44,140.72 0 top
H56  STAND-OFF  [STAND-OFF]  67.56,140.72 0 top
H57  STAND-OFF  [STAND-OFF]  10.67,160.27 0 top
H58  STAND-OFF  [STAND-OFF]  18.8,160.27 0 top
H59  STAND-OFF  [STAND-OFF]  26.92,160.27 0 top
H60  STAND-OFF  [STAND-OFF]  35.05,160.27 0 top
H61  STAND-OFF  [STAND-OFF]  43.18,160.27 0 top
H62  STAND-OFF  [STAND-OFF]  51.31,160.27 0 top
H63  STAND-OFF  [STAND-OFF]  59.44,160.27 0 top
H64  STAND-OFF  [STAND-OFF]  67.56,160.27 0 top
J1  QWIIC_RIGHT_ANGLE  [JST04_1MM_RA]  10.67,11.94 0 top
J2  [1X01_1MM_NO_SILK]  8.13,20.83 0 top
J3  [1X01_1MM_NO_SILK]  13.21,20.83 0 top
J4  QWIIC_RIGHT_ANGLE  [JST04_1MM_RA]  18.8,11.94 0 top
J5  [1X01_1MM_NO_SILK]  16.26,20.83 0 top
J6  [1X01_1MM_NO_SILK]  21.34,20.83 0 top
J7  QWIIC_RIGHT_ANGLE  [JST04_1MM_RA]  26.92,11.94 0 top
J8  [1X01_1MM_NO_SILK]  24.38,20.83 0 top
J9  [1X01_1MM_NO_SILK]  29.46,20.83 0 top
J10  QWIIC_RIGHT_ANGLE  [JST04_1MM_RA]  35.05,11.94 0 top
J11  [1X01_1MM_NO_SILK]  32.51,20.83 0 top
J12  [1X01_1MM_NO_SILK]  37.59,20.83 0 top
J13  QWIIC_RIGHT_ANGLE  [JST04_1MM_RA]  43.18,11.94 0 top
J14  [1X01_1MM_NO_SILK]  40.64,20.83 0 top
J15  [1X01_1MM_NO_SILK]  45.72,20.83 0 top
J16  QWIIC_RIGHT_ANGLE  [JST04_1MM_RA]  51.31,11.94 0 top
J17  [1X01_1MM_NO_SILK]  48.77,20.83 0 top
J18  [1X01_1MM_NO_SILK]  53.85,20.83 0 top
J19  QWIIC_RIGHT_ANGLE  [JST04_1MM_RA]  59.44,11.94 0 top
J20  [1X01_1MM_NO_SILK]  56.9,20.83 0 top
J21  [1X01_1MM_NO_SILK]  61.98,20.83 0 top
J22  QWIIC_RIGHT_ANGLE  [JST04_1MM_RA]  67.56,11.94 0 top
J23  [1X01_1MM_NO_SILK]  65.02,20.83 0 top
J24  [1X01_1MM_NO_SILK]  70.1,20.83 0 top
J25  QWIIC_RIGHT_ANGLE  [JST04_1MM_RA]  10.67,31.5 0 top
J26  [1X01_1MM_NO_SILK]  8.13,40.39 0 top
J27  [1X01_1MM_NO_SILK]  13.21,40.39 0 top
J28  QWIIC_RIGHT_ANGLE  [JST04_1MM_RA]  18.8,31.5 0 top
J29  [1X01_1MM_NO_SILK]  16.26,40.39 0 top
J30  [1X01_1MM_NO_SILK]  21.34,40.39 0 top
J31  QWIIC_RIGHT_ANGLE  [JST04_1MM_RA]  26.92,31.5 0 top
J32  [1X01_1MM_NO_SILK]  24.38,40.39 0 top
J33  [1X01_1MM_NO_SILK]  29.46,40.39 0 top
J34  QWIIC_RIGHT_ANGLE  [JST04_1MM_RA]  35.05,31.5 0 top
J35  [1X01_1MM_NO_SILK]  32.51,40.39 0 top
J36  [1X01_1MM_NO_SILK]  37.59,40.39 0 top
J37  QWIIC_RIGHT_ANGLE  [JST04_1MM_RA]  43.18,31.5 0 top
J38  [1X01_1MM_NO_SILK]  40.64,40.39 0 top
J39  [1X01_1MM_NO_SILK]  45.72,40.39 0 top
J40  QWIIC_RIGHT_ANGLE  [JST04_1MM_RA]  51.31,31.5 0 top
J41  [1X01_1MM_NO_SILK]  48.77,40.39 0 top
J42  [1X01_1MM_NO_SILK]  53.85,40.39 0 top
J43  QWIIC_RIGHT_ANGLE  [JST04_1MM_RA]  59.44,31.5 0 top
J44  [1X01_1MM_NO_SILK]  56.9,40.39 0 top
J45  [1X01_1MM_NO_SILK]  61.98,40.39 0 top
J46  QWIIC_RIGHT_ANGLE  [JST04_1MM_RA]  67.56,31.5 0 top
J47  [1X01_1MM_NO_SILK]  65.02,40.39 0 top
J48  [1X01_1MM_NO_SILK]  70.1,40.39 0 top
J49  QWIIC_RIGHT_ANGLE  [JST04_1MM_RA]  10.67,51.05 0 top
J50  [1X01_1MM_NO_SILK]  8.13,59.94 0 top
J51  [1X01_1MM_NO_SILK]  13.21,59.94 0 top
J52  QWIIC_RIGHT_ANGLE  [JST04_1MM_RA]  18.8,51.05 0 top
J53  [1X01_1MM_NO_SILK]  16.26,59.94 0 top
J54  [1X01_1MM_NO_SILK]  21.34,59.94 0 top
J55  QWIIC_RIGHT_ANGLE  [JST04_1MM_RA]  26.92,51.05 0 top
J56  [1X01_1MM_NO_SILK]  24.38,59.94 0 top
J57  [1X01_1MM_NO_SILK]  29.46,59.94 0 top
J58  QWIIC_RIGHT_ANGLE  [JST04_1MM_RA]  35.05,51.05 0 top
J59  [1X01_1MM_NO_SILK]  32.51,59.94 0 top
J60  [1X01_1MM_NO_SILK]  37.59,59.94 0 top
J61  QWIIC_RIGHT_ANGLE  [JST04_1MM_RA]  43.18,51.05 0 top
J62  [1X01_1MM_NO_SILK]  40.64,59.94 0 top
J63  [1X01_1MM_NO_SILK]  45.72,59.94 0 top
J64  QWIIC_RIGHT_ANGLE  [JST04_1MM_RA]  51.31,51.05 0 top
J65  [1X01_1MM_NO_SILK]  48.77,59.94 0 top
J66  [1X01_1MM_NO_SILK]  53.85,59.94 0 top
J67  QWIIC_RIGHT_ANGLE  [JST04_1MM_RA]  59.44,51.05 0 top
J68  [1X01_1MM_NO_SILK]  56.9,59.94 0 top
J69  [1X01_1MM_NO_SILK]  61.98,59.94 0 top
J70  QWIIC_RIGHT_ANGLE  [JST04_1MM_RA]  67.56,51.05 0 top
J71  [1X01_1MM_NO_SILK]  65.02,59.94 0 top
J72  [1X01_1MM_NO_SILK]  70.1,59.94 0 top
J73  QWIIC_RIGHT_ANGLE  [JST04_1MM_RA]  10.67,70.61 0 top
J74  [1X01_1MM_NO_SILK]  8.13,79.5 0 top
J75  [1X01_1MM_NO_SILK]  13.21,79.5 0 top
J76  QWIIC_RIGHT_ANGLE  [JST04_1MM_RA]  18.8,70.61 0 top
J77  [1X01_1MM_NO_SILK]  16.26,79.5 0 top
J78  [1X01_1MM_NO_SILK]  21.34,79.5 0 top
J79  QWIIC_RIGHT_ANGLE  [JST04_1MM_RA]  26.92,70.61 0 top
J80  [1X01_1MM_NO_SILK]  24.38,79.5 0 top
J81  [1X01_1MM_NO_SILK]  29.46,79.5 0 top
J82  QWIIC_RIGHT_ANGLE  [JST04_1MM_RA]  35.05,70.61 0 top
J83  [1X01_1MM_NO_SILK]  32.51,79.5 0 top
J84  [1X01_1MM_NO_SILK]  37.59,79.5 0 top
J85  QWIIC_RIGHT_ANGLE  [JST04_1MM_RA]  43.18,70.61 0 top
J86  [1X01_1MM_NO_SILK]  40.64,79.5 0 top
J87  [1X01_1MM_NO_SILK]  45.72,79.5 0 top
J88  QWIIC_RIGHT_ANGLE  [JST04_1MM_RA]  51.31,70.61 0 top
J89  [1X01_1MM_NO_SILK]  48.77,79.5 0 top
J90  [1X01_1MM_NO_SILK]  53.85,79.5 0 top
J91  QWIIC_RIGHT_ANGLE  [JST04_1MM_RA]  59.44,70.61 0 top
J92  [1X01_1MM_NO_SILK]  56.9,79.5 0 top
J93  [1X01_1MM_NO_SILK]  61.98,79.5 0 top
J94  QWIIC_RIGHT_ANGLE  [JST04_1MM_RA]  67.56,70.61 0 top
J95  [1X01_1MM_NO_SILK]  65.02,79.5 0 top
J96  [1X01_1MM_NO_SILK]  70.1,79.5 0 top
J97  QWIIC_RIGHT_ANGLE  [JST04_1MM_RA]  10.67,90.17 0 top
J98  [1X01_1MM_NO_SILK]  8.13,99.06 0 top
J99  [1X01_1MM_NO_SILK]  13.21,99.06 0 top
J100  QWIIC_RIGHT_ANGLE  [JST04_1MM_RA]  18.8,90.17 0 top
J101  [1X01_1MM_NO_SILK]  16.26,99.06 0 top
J102  [1X01_1MM_NO_SILK]  21.34,99.06 0 top
J103  QWIIC_RIGHT_ANGLE  [JST04_1MM_RA]  26.92,90.17 0 top
J104  [1X01_1MM_NO_SILK]  24.38,99.06 0 top
J105  [1X01_1MM_NO_SILK]  29.46,99.06 0 top
J106  QWIIC_RIGHT_ANGLE  [JST04_1MM_RA]  35.05,90.17 0 top
J107  [1X01_1MM_NO_SILK]  32.51,99.06 0 top
J108  [1X01_1MM_NO_SILK]  37.59,99.06 0 top
J109  QWIIC_RIGHT_ANGLE  [JST04_1MM_RA]  43.18,90.17 0 top
J110  [1X01_1MM_NO_SILK]  40.64,99.06 0 top
J111  [1X01_1MM_NO_SILK]  45.72,99.06 0 top
J112  QWIIC_RIGHT_ANGLE  [JST04_1MM_RA]  51.31,90.17 0 top
J113  [1X01_1MM_NO_SILK]  48.77,99.06 0 top
J114  [1X01_1MM_NO_SILK]  53.85,99.06 0 top
J115  QWIIC_RIGHT_ANGLE  [JST04_1MM_RA]  59.44,90.17 0 top
J116  [1X01_1MM_NO_SILK]  56.9,99.06 0 top
J117  [1X01_1MM_NO_SILK]  61.98,99.06 0 top
J118  QWIIC_RIGHT_ANGLE  [JST04_1MM_RA]  67.56,90.17 0 top
J119  [1X01_1MM_NO_SILK]  65.02,99.06 0 top
J120  [1X01_1MM_NO_SILK]  70.1,99.06 0 top
J121  QWIIC_RIGHT_ANGLE  [JST04_1MM_RA]  10.67,109.73 0 top
J122  [1X01_1MM_NO_SILK]  8.13,118.62 0 top
J123  [1X01_1MM_NO_SILK]  13.21,118.62 0 top
J124  QWIIC_RIGHT_ANGLE  [JST04_1MM_RA]  18.8,109.73 0 top
J125  [1X01_1MM_NO_SILK]  16.26,118.62 0 top
J126  [1X01_1MM_NO_SILK]  21.34,118.62 0 top
J127  QWIIC_RIGHT_ANGLE  [JST04_1MM_RA]  26.92,109.73 0 top
J128  [1X01_1MM_NO_SILK]  24.38,118.62 0 top
J129  [1X01_1MM_NO_SILK]  29.46,118.62 0 top
J130  QWIIC_RIGHT_ANGLE  [JST04_1MM_RA]  35.05,109.73 0 top
J131  [1X01_1MM_NO_SILK]  32.51,118.62 0 top
J132  [1X01_1MM_NO_SILK]  37.59,118.62 0 top
J133  QWIIC_RIGHT_ANGLE  [JST04_1MM_RA]  43.18,109.73 0 top
J134  [1X01_1MM_NO_SILK]  40.64,118.62 0 top
J135  [1X01_1MM_NO_SILK]  45.72,118.62 0 top
J136  QWIIC_RIGHT_ANGLE  [JST04_1MM_RA]  51.31,109.73 0 top
J137  [1X01_1MM_NO_SILK]  48.77,118.62 0 top
J138  [1X01_1MM_NO_SILK]  53.85,118.62 0 top
J139  QWIIC_RIGHT_ANGLE  [JST04_1MM_RA]  59.44,109.73 0 top
J140  [1X01_1MM_NO_SILK]  56.9,118.62 0 top
J141  [1X01_1MM_NO_SILK]  61.98,118.62 0 top
J142  QWIIC_RIGHT_ANGLE  [JST04_1MM_RA]  67.56,109.73 0 top
J143  [1X01_1MM_NO_SILK]  65.02,118.62 0 top
J144  [1X01_1MM_NO_SILK]  70.1,118.62 0 top
J145  QWIIC_RIGHT_ANGLE  [JST04_1MM_RA]  10.67,129.29 0 top
J146  [1X01_1MM_NO_SILK]  8.13,138.18 0 top
J147  [1X01_1MM_NO_SILK]  13.21,138.18 0 top
J148  QWIIC_RIGHT_ANGLE  [JST04_1MM_RA]  18.8,129.29 0 top
J149  [1X01_1MM_NO_SILK]  16.26,138.18 0 top
J150  [1X01_1MM_NO_SILK]  21.34,138.18 0 top
J151  QWIIC_RIGHT_ANGLE  [JST04_1MM_RA]  26.92,129.29 0 top
J152  [1X01_1MM_NO_SILK]  24.38,138.18 0 top
J153  [1X01_1MM_NO_SILK]  29.46,138.18 0 top
J154  QWIIC_RIGHT_ANGLE  [JST04_1MM_RA]  35.05,129.29 0 top
J155  [1X01_1MM_NO_SILK]  32.51,138.18 0 top
J156  [1X01_1MM_NO_SILK]  37.59,138.18 0 top
J157  QWIIC_RIGHT_ANGLE  [JST04_1MM_RA]  43.18,129.29 0 top
J158  [1X01_1MM_NO_SILK]  40.64,138.18 0 top
J159  [1X01_1MM_NO_SILK]  45.72,138.18 0 top
J160  QWIIC_RIGHT_ANGLE  [JST04_1MM_RA]  51.31,129.29 0 top
J161  [1X01_1MM_NO_SILK]  48.77,138.18 0 top
J162  [1X01_1MM_NO_SILK]  53.85,138.18 0 top
J163  QWIIC_RIGHT_ANGLE  [JST04_1MM_RA]  59.44,129.29 0 top
J164  [1X01_1MM_NO_SILK]  56.9,138.18 0 top
J165  [1X01_1MM_NO_SILK]  61.98,138.18 0 top
J166  QWIIC_RIGHT_ANGLE  [JST04_1MM_RA]  67.56,129.29 0 top
J167  [1X01_1MM_NO_SILK]  65.02,138.18 0 top
J168  [1X01_1MM_NO_SILK]  70.1,138.18 0 top
J169  QWIIC_RIGHT_ANGLE  [JST04_1MM_RA]  10.67,148.84 0 top
J170  [1X01_1MM_NO_SILK]  8.13,157.73 0 top
J171  [1X01_1MM_NO_SILK]  13.21,157.73 0 top
J172  QWIIC_RIGHT_ANGLE  [JST04_1MM_RA]  18.8,148.84 0 top
J173  [1X01_1MM_NO_SILK]  16.26,157.73 0 top
J174  [1X01_1MM_NO_SILK]  21.34,157.73 0 top
J175  QWIIC_RIGHT_ANGLE  [JST04_1MM_RA]  26.92,148.84 0 top
J176  [1X01_1MM_NO_SILK]  24.38,157.73 0 top
J177  [1X01_1MM_NO_SILK]  29.46,157.73 0 top
J178  QWIIC_RIGHT_ANGLE  [JST04_1MM_RA]  35.05,148.84 0 top
J179  [1X01_1MM_NO_SILK]  32.51,157.73 0 top
J180  [1X01_1MM_NO_SILK]  37.59,157.73 0 top
J181  QWIIC_RIGHT_ANGLE  [JST04_1MM_RA]  43.18,148.84 0 top
J182  [1X01_1MM_NO_SILK]  40.64,157.73 0 top
J183  [1X01_1MM_NO_SILK]  45.72,157.73 0 top
J184  QWIIC_RIGHT_ANGLE  [JST04_1MM_RA]  51.31,148.84 0 top
J185  [1X01_1MM_NO_SILK]  48.77,157.73 0 top
J186  [1X01_1MM_NO_SILK]  53.85,157.73 0 top
J187  QWIIC_RIGHT_ANGLE  [JST04_1MM_RA]  59.44,148.84 0 top
J188  [1X01_1MM_NO_SILK]  56.9,157.73 0 top
J189  [1X01_1MM_NO_SILK]  61.98,157.73 0 top
J190  QWIIC_RIGHT_ANGLE  [JST04_1MM_RA]  67.56,148.84 0 top
J191  [1X01_1MM_NO_SILK]  65.02,157.73 0 top
J192  [1X01_1MM_NO_SILK]  70.1,157.73 0 top
JP1  ADR  [SMT-JUMPER_3_1-NC_TRACE_SILK]  9.4,15.75 270 bottom
JP2  I2C  [SMT-JUMPER_3_2-NC_TRACE_SILK]  11.94,15.75 90 bottom
JP3  LED  [SMT-JUMPER_2_NC_TRACE_SILK]  12.06,19.43 0 bottom
JP4  ADR  [SMT-JUMPER_3_1-NC_TRACE_SILK]  17.53,15.75 270 bottom
JP5  I2C  [SMT-JUMPER_3_2-NC_TRACE_SILK]  20.07,15.75 90 bottom
JP6  LED  [SMT-JUMPER_2_NC_TRACE_SILK]  20.19,19.43 0 bottom
JP7  ADR  [SMT-JUMPER_3_1-NC_TRACE_SILK]  25.65,15.75 270 bottom
JP8  I2C  [SMT-JUMPER_3_2-NC_TRACE_SILK]  28.19,15.75 90 bottom
JP9  LED  [SMT-JUMPER_2_NC_TRACE_SILK]  28.32,19.43 0 bottom
JP10  ADR  [SMT-JUMPER_3_1-NC_TRACE_SILK]  33.78,15.75 270 bottom
JP11  I2C  [SMT-JUMPER_3_2-NC_TRACE_SILK]  36.32,15.75 90 bottom
JP12  LED  [SMT-JUMPER_2_NC_TRACE_SILK]  36.45,19.43 0 bottom
JP13  ADR  [SMT-JUMPER_3_1-NC_TRACE_SILK]  41.91,15.75 270 bottom
JP14  I2C  [SMT-JUMPER_3_2-NC_TRACE_SILK]  44.45,15.75 90 bottom
JP15  LED  [SMT-JUMPER_2_NC_TRACE_SILK]  44.58,19.43 0 bottom
JP16  ADR  [SMT-JUMPER_3_1-NC_TRACE_SILK]  50.04,15.75 270 bottom
JP17  I2C  [SMT-JUMPER_3_2-NC_TRACE_SILK]  52.58,15.75 90 bottom
JP18  LED  [SMT-JUMPER_2_NC_TRACE_SILK]  52.7,19.43 0 bottom
JP19  ADR  [SMT-JUMPER_3_1-NC_TRACE_SILK]  58.17,15.75 270 bottom
JP20  I2C  [SMT-JUMPER_3_2-NC_TRACE_SILK]  60.71,15.75 90 bottom
JP21  LED  [SMT-JUMPER_2_NC_TRACE_SILK]  60.83,19.43 0 bottom
JP22  ADR  [SMT-JUMPER_3_1-NC_TRACE_SILK]  66.29,15.75 270 bottom
JP23  I2C  [SMT-JUMPER_3_2-NC_TRACE_SILK]  68.83,15.75 90 bottom
JP24  LED  [SMT-JUMPER_2_NC_TRACE_SILK]  68.96,19.43 0 bottom
JP25  ADR  [SMT-JUMPER_3_1-NC_TRACE_SILK]  9.4,35.31 270 bottom
JP26  I2C  [SMT-JUMPER_3_2-NC_TRACE_SILK]  11.94,35.31 90 bottom
JP27  LED  [SMT-JUMPER_2_NC_TRACE_SILK]  12.06,38.99 0 bottom
JP28  ADR  [SMT-JUMPER_3_1-NC_TRACE_SILK]  17.53,35.31 270 bottom
JP29  I2C  [SMT-JUMPER_3_2-NC_TRACE_SILK]  20.07,35.31 90 bottom
JP30  LED  [SMT-JUMPER_2_NC_TRACE_SILK]  20.19,38.99 0 bottom
JP31  ADR  [SMT-JUMPER_3_1-NC_TRACE_SILK]  25.65,35.31 270 bottom
JP32  I2C  [SMT-JUMPER_3_2-NC_TRACE_SILK]  28.19,35.31 90 bottom
JP33  LED  [SMT-JUMPER_2_NC_TRACE_SILK]  28.32,38.99 0 bottom
JP34  ADR  [SMT-JUMPER_3_1-NC_TRACE_SILK]  33.78,35.31 270 bottom
JP35  I2C  [SMT-JUMPER_3_2-NC_TRACE_SILK]  36.32,35.31 90 bottom
JP36  LED  [SMT-JUMPER_2_NC_TRACE_SILK]  36.45,38.99 0 bottom
JP37  ADR  [SMT-JUMPER_3_1-NC_TRACE_SILK]  41.91,35.31 270 bottom
JP38  I2C  [SMT-JUMPER_3_2-NC_TRACE_SILK]  44.45,35.31 90 bottom
JP39  LED  [SMT-JUMPER_2_NC_TRACE_SILK]  44.58,38.99 0 bottom
JP40  ADR  [SMT-JUMPER_3_1-NC_TRACE_SILK]  50.04,35.31 270 bottom
JP41  I2C  [SMT-JUMPER_3_2-NC_TRACE_SILK]  52.58,35.31 90 bottom
JP42  LED  [SMT-JUMPER_2_NC_TRACE_SILK]  52.7,38.99 0 bottom
JP43  ADR  [SMT-JUMPER_3_1-NC_TRACE_SILK]  58.17,35.31 270 bottom
JP44  I2C  [SMT-JUMPER_3_2-NC_TRACE_SILK]  60.71,35.31 90 bottom
JP45  LED  [SMT-JUMPER_2_NC_TRACE_SILK]  60.83,38.99 0 bottom
JP46  ADR  [SMT-JUMPER_3_1-NC_TRACE_SILK]  66.29,35.31 270 bottom
JP47  I2C  [SMT-JUMPER_3_2-NC_TRACE_SILK]  68.83,35.31 90 bottom
JP48  LED  [SMT-JUMPER_2_NC_TRACE_SILK]  68.96,38.99 0 bottom
JP49  ADR  [SMT-JUMPER_3_1-NC_TRACE_SILK]  9.4,54.86 270 bottom
JP50  I2C  [SMT-JUMPER_3_2-NC_TRACE_SILK]  11.94,54.86 90 bottom
JP51  LED  [SMT-JUMPER_2_NC_TRACE_SILK]  12.06,58.55 0 bottom
JP52  ADR  [SMT-JUMPER_3_1-NC_TRACE_SILK]  17.53,54.86 270 bottom
JP53  I2C  [SMT-JUMPER_3_2-NC_TRACE_SILK]  20.07,54.86 90 bottom
JP54  LED  [SMT-JUMPER_2_NC_TRACE_SILK]  20.19,58.55 0 bottom
JP55  ADR  [SMT-JUMPER_3_1-NC_TRACE_SILK]  25.65,54.86 270 bottom
JP56  I2C  [SMT-JUMPER_3_2-NC_TRACE_SILK]  28.19,54.86 90 bottom
JP57  LED  [SMT-JUMPER_2_NC_TRACE_SILK]  28.32,58.55 0 bottom
JP58  ADR  [SMT-JUMPER_3_1-NC_TRACE_SILK]  33.78,54.86 270 bottom
JP59  I2C  [SMT-JUMPER_3_2-NC_TRACE_SILK]  36.32,54.86 90 bottom
JP60  LED  [SMT-JUMPER_2_NC_TRACE_SILK]  36.45,58.55 0 bottom
JP61  ADR  [SMT-JUMPER_3_1-NC_TRACE_SILK]  41.91,54.86 270 bottom
JP62  I2C  [SMT-JUMPER_3_2-NC_TRACE_SILK]  44.45,54.86 90 bottom
JP63  LED  [SMT-JUMPER_2_NC_TRACE_SILK]  44.58,58.55 0 bottom
JP64  ADR  [SMT-JUMPER_3_1-NC_TRACE_SILK]  50.04,54.86 270 bottom
JP65  I2C  [SMT-JUMPER_3_2-NC_TRACE_SILK]  52.58,54.86 90 bottom
JP66  LED  [SMT-JUMPER_2_NC_TRACE_SILK]  52.7,58.55 0 bottom
JP67  ADR  [SMT-JUMPER_3_1-NC_TRACE_SILK]  58.17,54.86 270 bottom
JP68  I2C  [SMT-JUMPER_3_2-NC_TRACE_SILK]  60.71,54.86 90 bottom
JP69  LED  [SMT-JUMPER_2_NC_TRACE_SILK]  60.83,58.55 0 bottom
JP70  ADR  [SMT-JUMPER_3_1-NC_TRACE_SILK]  66.29,54.86 270 bottom
JP71  I2C  [SMT-JUMPER_3_2-NC_TRACE_SILK]  68.83,54.86 90 bottom
JP72  LED  [SMT-JUMPER_2_NC_TRACE_SILK]  68.96,58.55 0 bottom
JP73  ADR  [SMT-JUMPER_3_1-NC_TRACE_SILK]  9.4,74.42 270 bottom
JP74  I2C  [SMT-JUMPER_3_2-NC_TRACE_SILK]  11.94,74.42 90 bottom
JP75  LED  [SMT-JUMPER_2_NC_TRACE_SILK]  12.06,78.11 0 bottom
JP76  ADR  [SMT-JUMPER_3_1-NC_TRACE_SILK]  17.53,74.42 270 bottom
JP77  I2C  [SMT-JUMPER_3_2-NC_TRACE_SILK]  20.07,74.42 90 bottom
JP78  LED  [SMT-JUMPER_2_NC_TRACE_SILK]  20.19,78.11 0 bottom
JP79  ADR  [SMT-JUMPER_3_1-NC_TRACE_SILK]  25.65,74.42 270 bottom
JP80  I2C  [SMT-JUMPER_3_2-NC_TRACE_SILK]  28.19,74.42 90 bottom
JP81  LED  [SMT-JUMPER_2_NC_TRACE_SILK]  28.32,78.11 0 bottom
JP82  ADR  [SMT-JUMPER_3_1-NC_TRACE_SILK]  33.78,74.42 270 bottom
JP83  I2C  [SMT-JUMPER_3_2-NC_TRACE_SILK]  36.32,74.42 90 bottom
JP84  LED  [SMT-JUMPER_2_NC_TRACE_SILK]  36.45,78.11 0 bottom
JP85  ADR  [SMT-JUMPER_3_1-NC_TRACE_SILK]  41.91,74.42 270 bottom
JP86  I2C  [SMT-JUMPER_3_2-NC_TRACE_SILK]  44.45,74.42 90 bottom
JP87  LED  [SMT-JUMPER_2_NC_TRACE_SILK]  44.58,78.11 0 bottom
JP88  ADR  [SMT-JUMPER_3_1-NC_TRACE_SILK]  50.04,74.42 270 bottom
JP89  I2C  [SMT-JUMPER_3_2-NC_TRACE_SILK]  52.58,74.42 90 bottom
JP90  LED  [SMT-JUMPER_2_NC_TRACE_SILK]  52.7,78.11 0 bottom
JP91  ADR  [SMT-JUMPER_3_1-NC_TRACE_SILK]  58.17,74.42 270 bottom
JP92  I2C  [SMT-JUMPER_3_2-NC_TRACE_SILK]  60.71,74.42 90 bottom
JP93  LED  [SMT-JUMPER_2_NC_TRACE_SILK]  60.83,78.11 0 bottom
JP94  ADR  [SMT-JUMPER_3_1-NC_TRACE_SILK]  66.29,74.42 270 bottom
JP95  I2C  [SMT-JUMPER_3_2-NC_TRACE_SILK]  68.83,74.42 90 bottom
JP96  LED  [SMT-JUMPER_2_NC_TRACE_SILK]  68.96,78.11 0 bottom
JP97  ADR  [SMT-JUMPER_3_1-NC_TRACE_SILK]  9.4,93.98 270 bottom
JP98  I2C  [SMT-JUMPER_3_2-NC_TRACE_SILK]  11.94,93.98 90 bottom
JP99  LED  [SMT-JUMPER_2_NC_TRACE_SILK]  12.06,97.66 0 bottom
JP100  ADR  [SMT-JUMPER_3_1-NC_TRACE_SILK]  17.53,93.98 270 bottom
JP101  I2C  [SMT-JUMPER_3_2-NC_TRACE_SILK]  20.07,93.98 90 bottom
JP102  LED  [SMT-JUMPER_2_NC_TRACE_SILK]  20.19,97.66 0 bottom
JP103  ADR  [SMT-JUMPER_3_1-NC_TRACE_SILK]  25.65,93.98 270 bottom
JP104  I2C  [SMT-JUMPER_3_2-NC_TRACE_SILK]  28.19,93.98 90 bottom
JP105  LED  [SMT-JUMPER_2_NC_TRACE_SILK]  28.32,97.66 0 bottom
JP106  ADR  [SMT-JUMPER_3_1-NC_TRACE_SILK]  33.78,93.98 270 bottom
JP107  I2C  [SMT-JUMPER_3_2-NC_TRACE_SILK]  36.32,93.98 90 bottom
JP108  LED  [SMT-JUMPER_2_NC_TRACE_SILK]  36.45,97.66 0 bottom
JP109  ADR  [SMT-JUMPER_3_1-NC_TRACE_SILK]  41.91,93.98 270 bottom
JP110  I2C  [SMT-JUMPER_3_2-NC_TRACE_SILK]  44.45,93.98 90 bottom
JP111  LED  [SMT-JUMPER_2_NC_TRACE_SILK]  44.58,97.66 0 bottom
JP112  ADR  [SMT-JUMPER_3_1-NC_TRACE_SILK]  50.04,93.98 270 bottom
JP113  I2C  [SMT-JUMPER_3_2-NC_TRACE_SILK]  52.58,93.98 90 bottom
JP114  LED  [SMT-JUMPER_2_NC_TRACE_SILK]  52.7,97.66 0 bottom
JP115  ADR  [SMT-JUMPER_3_1-NC_TRACE_SILK]  58.17,93.98 270 bottom
JP116  I2C  [SMT-JUMPER_3_2-NC_TRACE_SILK]  60.71,93.98 90 bottom
JP117  LED  [SMT-JUMPER_2_NC_TRACE_SILK]  60.83,97.66 0 bottom
JP118  ADR  [SMT-JUMPER_3_1-NC_TRACE_SILK]  66.29,93.98 270 bottom
JP119  I2C  [SMT-JUMPER_3_2-NC_TRACE_SILK]  68.83,93.98 90 bottom
JP120  LED  [SMT-JUMPER_2_NC_TRACE_SILK]  68.96,97.66 0 bottom
JP121  ADR  [SMT-JUMPER_3_1-NC_TRACE_SILK]  9.4,113.54 270 bottom
JP122  I2C  [SMT-JUMPER_3_2-NC_TRACE_SILK]  11.94,113.54 90 bottom
JP123  LED  [SMT-JUMPER_2_NC_TRACE_SILK]  12.06,117.22 0 bottom
JP124  ADR  [SMT-JUMPER_3_1-NC_TRACE_SILK]  17.53,113.54 270 bottom
JP125  I2C  [SMT-JUMPER_3_2-NC_TRACE_SILK]  20.07,113.54 90 bottom
JP126  LED  [SMT-JUMPER_2_NC_TRACE_SILK]  20.19,117.22 0 bottom
JP127  ADR  [SMT-JUMPER_3_1-NC_TRACE_SILK]  25.65,113.54 270 bottom
JP128  I2C  [SMT-JUMPER_3_2-NC_TRACE_SILK]  28.19,113.54 90 bottom
JP129  LED  [SMT-JUMPER_2_NC_TRACE_SILK]  28.32,117.22 0 bottom
JP130  ADR  [SMT-JUMPER_3_1-NC_TRACE_SILK]  33.78,113.54 270 bottom
JP131  I2C  [SMT-JUMPER_3_2-NC_TRACE_SILK]  36.32,113.54 90 bottom
JP132  LED  [SMT-JUMPER_2_NC_TRACE_SILK]  36.45,117.22 0 bottom
JP133  ADR  [SMT-JUMPER_3_1-NC_TRACE_SILK]  41.91,113.54 270 bottom
JP134  I2C  [SMT-JUMPER_3_2-NC_TRACE_SILK]  44.45,113.54 90 bottom
JP135  LED  [SMT-JUMPER_2_NC_TRACE_SILK]  44.58,117.22 0 bottom
JP136  ADR  [SMT-JUMPER_3_1-NC_TRACE_SILK]  50.04,113.54 270 bottom
JP137  I2C  [SMT-JUMPER_3_2-NC_TRACE_SILK]  52.58,113.54 90 bottom
JP138  LED  [SMT-JUMPER_2_NC_TRACE_SILK]  52.7,117.22 0 bottom
JP139  ADR  [SMT-JUMPER_3_1-NC_TRACE_SILK]  58.17,113.54 270 bottom
JP140  I2C  [SMT-JUMPER_3_2-NC_TRACE_SILK]  60.71,113.54 90 bottom
JP141  LED  [SMT-JUMPER_2_NC_TRACE_SILK]  60.83,117.22 0 bottom
JP142  ADR  [SMT-JUMPER_3_1-NC_TRACE_SILK]  66.29,113.54 270 bottom
JP143  I2C  [SMT-JUMPER_3_2-NC_TRACE_SILK]  68.83,113.54 90 bottom
JP144  LED  [SMT-JUMPER_2_NC_TRACE_SILK]  68.96,117.22 0 bottom
JP145  ADR  [SMT-JUMPER_3_1-NC_TRACE_SILK]  9.4,133.1 270 bottom